# EAGLE board F87MJRMJT4TMZTT (EAGLE 9.2.2)

Size 160 x 100 mm. Coordinates in mm from the lower left corner, seen from the top.
Outline: 0,0 160,0 160,100 0,100 0,0
Copper layers (1*16): Top 0.035mm / dielectric 1.5mm / Bottom 0.035mm
Design rules "default": minimum track width 6mil, minimum drill 0.35mm, track to track 6mil, track to pad 6mil, pad to pad 6mil, via to via 6mil, smd to smd 6mil, copper to edge 40mil, drill to drill 6mil, minimum pad ring 10mil, minimum via ring 8mil, stop-mask expansion 4mil, vias tented up to drill 0mil, thermal gap 10mil

## Footprints (pad centres in the part's own frame; a part is rotated, then mirrored left to right if it is on the bottom)
TT2D7 = drill 0.813: + -1.27,0 | drill 0.813 octagon: - 1.27,0
3,17/1,3 = drill 1.321 pad 3.175 octagon: 1 0,0
MEGA_ARDUINO_1 = drill 1.016 long: 1 33.02,2.54; 2 35.56,2.54; 3 38.1,2.54; 4 40.64,2.54; 5 43.18,2.54; 6 45.72,2.54; 7 50.8,2.54; 8 53.34,2.54; 9 55.88,2.54; 10 58.42,2.54; 11 60.96,2.54; 12 63.5,2.54; 13 66.04,2.54; 14 68.58,2.54; 15 73.66,2.54; 16 76.2,2.54; 17 78.74,2.54; 18 81.28,2.54; 19 83.82,2.54; 20 86.36,2.54; 21 88.9,2.54; 22 91.44,2.54; 23 86.36,50.8; 24 83.82,50.8; 25 81.28,50.8; 26 78.74,50.8; 27 76.2,50.8; 28 73.66,50.8; 29 71.12,50.8; 30 68.58,50.8; 31 63.5,50.8; 32 60.96,50.8; 33 58.42,50.8; 34 55.88,50.8; 35 53.34,50.8; 36 50.8,50.8; 37 48.26,50.8; 38 45.72,50.8; 39 41.91,50.8; 40 39.37,50.8; 41 36.83,50.8; 42 34.29,50.8; 43 31.75,50.8; 44 29.21,50.8; 45 26.67,50.8; 46 24.13,50.8 | drill 1.016 octagon: 47 93.98,50.8; 48 96.52,50.8; 49 93.98,48.26; 50 96.52,48.26; 51 93.98,45.72; 52 96.52,45.72; 53 93.98,43.18; 54 96.52,43.18; 55 93.98,40.64; 56 96.52,40.64; 57 93.98,38.1; 58 96.52,38.1; 59 93.98,35.56; 60 96.52,35.56; 61 93.98,33.02; 62 96.52,33.02; 63 93.98,30.48; 64 96.52,30.48; 65 93.98,27.94; 66 96.52,27.94; 67 93.98,25.4; 68 96.52,25.4; 69 93.98,22.86; 70 96.52,22.86; 71 93.98,20.32; 72 96.52,20.32; 73 93.98,17.78; 74 96.52,17.78; 75 93.98,15.24; 76 96.52,15.24; 77 93.98,12.7; 78 96.52,12.7; 79 93.98,10.16; 80 96.52,10.16; 81 93.98,7.62; 82 96.52,7.62
POLULU_A4988 = drill 1 long: 1A 10.16,0; 1B 12.7,0; 2A 7.62,0; 2B 5.08,0; !EN 0,-12.7; !RESET 10.16,-12.7; !SLEEP 12.7,-12.7; DIR 17.78,-12.7; GND@1 17.78,0; GND@2 2.54,0; MS1 2.54,-12.7; MS2 5.08,-12.7; MS3 7.62,-12.7; STEP 15.24,-12.7; VDD 15.24,0; VMOT 0,0
4PIN_JST = drill 1: 1 0,0; 2 2.5,0; 3 5,0; 4 7.5,0
SJW = smd 1.27 x 2.54: 1 -1.27,0; 2 1.27,0

## Placement (x,y rotation side)
C1  100µF  [TT2D7]  -66.04,72.39 0 top  (outside the outline)
C2  100µF  [TT2D7]  -78.74,72.39 0 top  (outside the outline)
C3  100µF  [TT2D7]  -91.44,72.39 0 top  (outside the outline)
C4  100µF  [TT2D7]  -104.14,72.39 0 top  (outside the outline)
C5  100µF  [TT2D7]  -22.86,87.63 0 top  (outside the outline)
C6  100µF  [TT2D7]  -35.56,87.63 0 top  (outside the outline)
GND  [3,17/1,3]  -34.29,93.98 0 top  (outside the outline)
IC2  [MEGA_ARDUINO_1]  -114.3,1.27 0 top  (outside the outline)
M1  POLULUA4988CORRECT  [POLULU_A4988]  -30.48,67.31 0 top  (outside the outline)
M2  POLULUA4988CORRECT  [POLULU_A4988]  -52.07,67.31 0 top  (outside the outline)
M3  POLULUA4988CORRECT  [POLULU_A4988]  -73.66,67.31 0 top  (outside the outline)
M4  POLULUA4988CORRECT  [POLULU_A4988]  -95.25,67.31 0 top  (outside the outline)
M5  POLULUA4988CORRECT  [POLULU_A4988]  -30.48,82.55 0 top  (outside the outline)
M6  POLULUA4988CORRECT  [POLULU_A4988]  -52.07,82.55 0 top  (outside the outline)
MOT1  4PIN_JST  [4PIN_JST]  -113.03,-45.72 0 top  (outside the outline)
MOT2  4PIN_JST  [4PIN_JST]  -113.03,-54.61 0 top  (outside the outline)
MOT3  4PIN_JST  [4PIN_JST]  -113.03,-63.5 0 top  (outside the outline)
MOT4  4PIN_JST  [4PIN_JST]  -113.03,-72.39 0 top  (outside the outline)
MOT5  4PIN_JST  [4PIN_JST]  -113.03,-81.28 0 top  (outside the outline)
MOT6  4PIN_JST  [4PIN_JST]  -113.03,-90.17 0 top  (outside the outline)
SJ1  [SJW]  -44.45,100.33 0 top  (outside the outline)
SJ2  [SJW]  -111.76,-3.81 0 top  (outside the outline)
SJ3  [SJW]  -111.76,-10.16 0 top  (outside the outline)
SJ4  [SJW]  -111.76,-16.51 0 top  (outside the outline)
SJ5  [SJW]  -111.76,-22.86 0 top  (outside the outline)
SJ6  [SJW]  -111.76,-29.21 0 top  (outside the outline)
SJ7  [SJW]  -111.76,-96.52 0 top  (outside the outline)
SJ8  [SJW]  -111.76,-102.87 0 top  (outside the outline)
SJ9  [SJW]  -111.76,-109.22 0 top  (outside the outline)
SJ10  [SJW]  -111.76,-115.57 0 top  (outside the outline)
SJ11  [SJW]  -111.76,-128.27 0 top  (outside the outline)
SJ12  [SJW]  -111.76,-121.92 0 top  (outside the outline)
SJ13  [SJW]  -111.76,-134.62 0 top  (outside the outline)
SJ14  [SJW]  -111.76,-140.97 0 top  (outside the outline)
SJ15  [SJW]  -111.76,-147.32 0 top  (outside the outline)
SJ16  [SJW]  -111.76,-153.67 0 top  (outside the outline)
SJ17  [SJW]  -111.76,-160.02 0 top  (outside the outline)
SJ18  [SJW]  -111.76,-166.37 0 top  (outside the outline)
VCC  [3,17/1,3]  -39.37,93.98 0 top  (outside the outline)
VMOT.  [3,17/1,3]  -29.21,93.98 0 top  (outside the outline)

## Library data of the parts
C1-C6 = rcl; SPICEPREFIX: C
GND VCC VMOT. = wirepad
IC2 = arduino
M1-M6 MOT1-MOT6 = Costume
SJ1-SJ18 = jumper

## Nets
+3V3: IC2.2
+5V: IC2.3 IC2.47 IC2.48
GND: C1.- C2.- C3.- C4.- C5.- C6.- GND.1 IC2.4 IC2.5 IC2.45 IC2.81 IC2.82 M1.GND@1 M1.GND@2 M2.GND@1 M2.GND@2 M3.GND@1 M3.GND@2 M4.GND@1 M4.GND@2 M5.GND@1 M5.GND@2 M6.GND@1 M6.GND@2
MOT1DIR: IC2.33 M1.STEP
MOT1EN: M1.!EN
MOT1STEP: IC2.34 M1.DIR
MOT2DIR: IC2.35 M2.STEP
MOT2EN: M2.!EN
MOT2STEP: IC2.36 M2.DIR
MOT3DIR: IC2.37 M3.STEP
MOT3EN: M3.!EN
MOT3STEP: IC2.38 M3.DIR
MOT4DIR: IC2.39 M4.STEP
MOT4EN: M4.!EN
MOT4STEP: IC2.40 M4.DIR
MOT5DIR: IC2.41 M5.STEP
MOT5EN: M5.!EN
MOT5STEP: IC2.42 M5.DIR
MOT6DIR: IC2.43 M6.STEP
MOT6EN: M6.!EN
MOT6STEP: IC2.44 M6.DIR
N$2: M1.MS1 SJ1.2
N$3: M1.MS2 SJ2.2
N$4: M1.MS3 SJ3.2
N$5: M1.2B MOT1.1
N$6: M1.2A MOT1.2
N$7: M1.1A MOT1.3
N$8: M1.1B MOT1.4
N$10: M2.MS1 SJ4.2
N$11: M2.MS2 SJ5.2
N$12: M2.MS3 SJ6.2
N$13: M2.2B MOT2.1
N$14: M2.2A MOT2.2
N$15: M2.1A MOT2.3
N$16: M2.1B MOT2.4
N$17: M2.!RESET M2.!SLEEP
N$19: M3.MS1
N$20: M3.MS2
N$21: M3.MS3
N$22: M3.2B MOT3.1
N$23: M3.2A MOT3.2
N$24: M3.1A MOT3.3
N$25: M3.1B MOT3.4
N$26: M3.!RESET M3.!SLEEP
N$28: SJ7.2
N$29: SJ8.2
N$30: SJ9.2
N$31: M4.2B MOT4.1
N$32: M4.2A MOT4.2
N$33: M4.1A MOT4.3
N$34: M4.1B MOT4.4
N$35: M4.!RESET M4.!SLEEP
N$37: M4.MS1 SJ10.2
N$38: M4.MS2 SJ11.2
N$39: M4.MS3 SJ12.2
N$40: M5.2B MOT5.1
N$41: M5.2A MOT5.2
N$42: M5.1A MOT5.3
N$43: M5.1B MOT5.4
N$44: M5.!RESET M5.!SLEEP
N$46: M5.MS1 SJ13.2
N$47: M5.MS2 SJ14.2
N$48: M5.MS3 SJ15.2
N$49: M6.2B MOT6.1
N$50: M6.2A MOT6.2
N$51: M6.1A MOT6.3
N$52: M6.1B MOT6.4
N$53: M6.!RESET M6.!SLEEP
N$54: M6.MS1 SJ16.2
N$55: M6.MS2 SJ17.2
N$56: M6.MS3 SJ18.2
N$58: M1.!RESET M1.!SLEEP
VCC: IC2.6 M1.VDD M2.VDD M3.VDD M4.VDD M5.VDD M6.VDD SJ1.1 SJ2.1 SJ3.1 SJ4.1 SJ5.1 SJ6.1 SJ7.1 SJ8.1 SJ9.1 SJ10.1 SJ11.1 SJ12.1 SJ13.1 SJ14.1 SJ15.1 SJ16.1 SJ17.1 SJ18.1 VCC.1
VMOT: C1.+ C2.+ C3.+ C4.+ C5.+ C6.+ M1.VMOT M2.VMOT M3.VMOT M4.VMOT M5.VMOT M6.VMOT VMOT..1

## Tracks (layer width: path | path; a pad name or v marks a point on that pad's centre or on a via)
+5V  (2 unrouted)
GND  (23 unrouted)
MOT1DIR  (1 unrouted)
MOT1STEP  (1 unrouted)
MOT2DIR  (1 unrouted)
MOT2STEP  (1 unrouted)
MOT3DIR  (1 unrouted)
MOT3STEP  (1 unrouted)
MOT4DIR  (1 unrouted)
MOT4STEP  (1 unrouted)
MOT5DIR  (1 unrouted)
MOT5STEP  (1 unrouted)
MOT6DIR  (1 unrouted)
MOT6STEP  (1 unrouted)
N$2  (1 unrouted)
N$3  (1 unrouted)
N$4  (1 unrouted)
N$5  (1 unrouted)
N$6  (1 unrouted)
N$7  (1 unrouted)
N$8  (1 unrouted)
N$10  (1 unrouted)
N$11  (1 unrouted)
N$12  (1 unrouted)
N$13  (1 unrouted)
N$14  (1 unrouted)
N$15  (1 unrouted)
N$16  (1 unrouted)
N$17  (1 unrouted)
N$22  (1 unrouted)
N$23  (1 unrouted)
N$24  (1 unrouted)
N$25  (1 unrouted)
N$26  (1 unrouted)
N$31  (1 unrouted)
N$32  (1 unrouted)
N$33  (1 unrouted)
N$34  (1 unrouted)
N$35  (1 unrouted)
N$37  (1 unrouted)
N$38  (1 unrouted)
N$39  (1 unrouted)
N$40  (1 unrouted)
N$41  (1 unrouted)
N$42  (1 unrouted)
N$43  (1 unrouted)
N$44  (1 unrouted)
N$46  (1 unrouted)
N$47  (1 unrouted)
N$48  (1 unrouted)
N$49  (1 unrouted)
N$50  (1 unrouted)
N$51  (1 unrouted)
N$52  (1 unrouted)
N$53  (1 unrouted)
N$54  (1 unrouted)
N$55  (1 unrouted)
N$56  (1 unrouted)
N$58  (1 unrouted)
VCC  (25 unrouted)
VMOT  (12 unrouted)